# EAGLE board RJ45x5-panel (EAGLE 7.4.0)
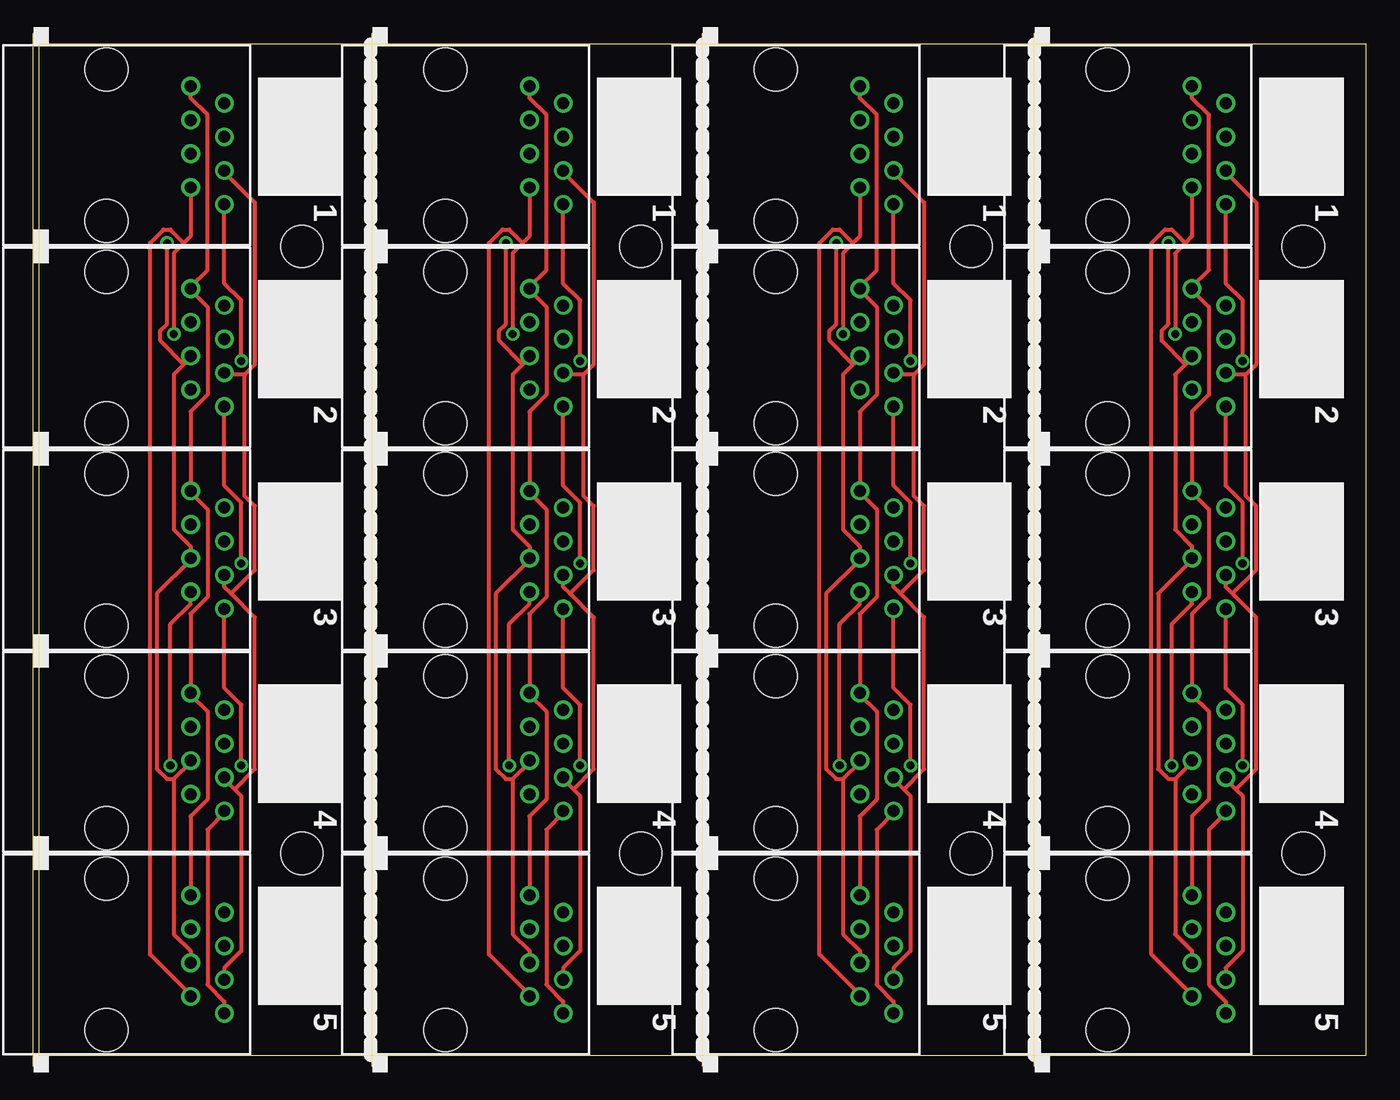
[diagram p0: board, top side]
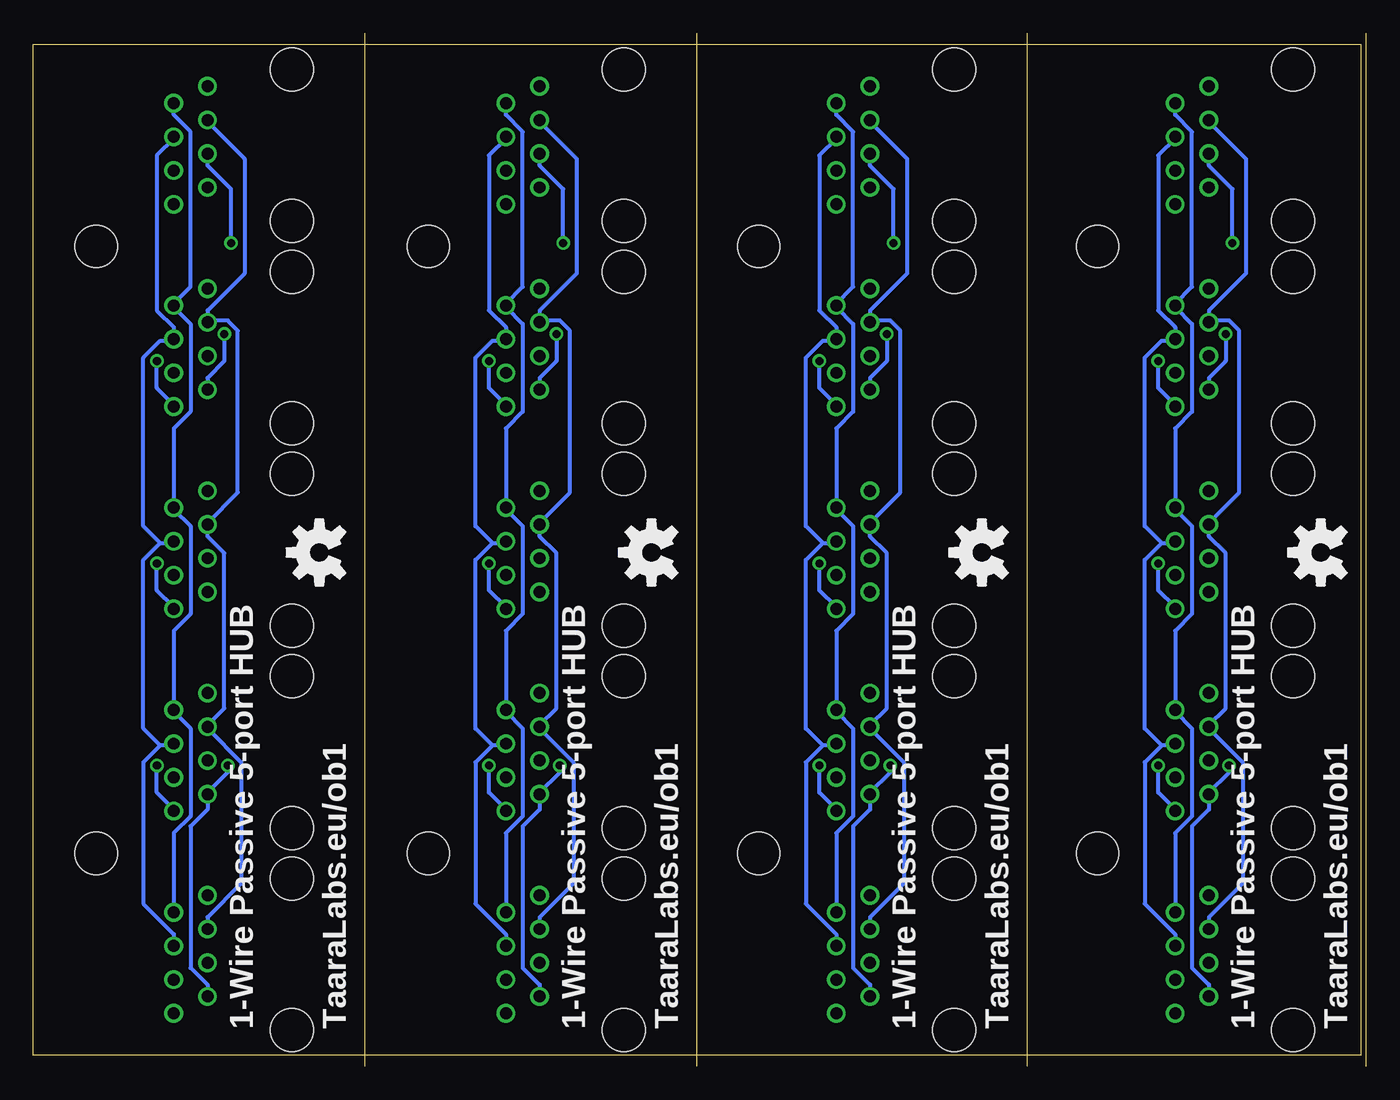
[diagram p1: board, bottom side, seen from below]

Size 100 x 76.19 mm. Coordinates in mm from the lower left corner, seen from the top.
Outline: 0,0 25,0 50,0 75,0 100,0 100,76.19 75,76.19 50,76.19 25,76.19 0,76.19 0,0
Copper layers (1*16): Top 0.035mm / dielectric 1.5mm / Bottom 0.035mm
Design rules "default *": minimum track width 12mil, minimum drill 24mil, track to track 8mil, track to pad 8mil, pad to pad 8mil, via to via 8mil, smd to smd 8mil, copper to edge 40mil, drill to drill 8mil, minimum pad ring 10mil, minimum via ring 8mil, stop-mask expansion 4mil, vias tented up to drill 0mil, thermal gap 10mil
Holes 3.2 mm at 19.81,60.96 19.81,15.24 45.34,60.96 45.34,15.24 70.23,60.96 70.23,15.24 95.25,60.96 95.25,15.24

## Footprints (pad centres in the part's own frame; a part is rotated, then mirrored left to right if it is on the bottom)
RJ45-NO-SHIELD = drill 0.9 pad 1.4: 1 -4.445,6.35; 2 -3.175,8.89; 3 -1.905,6.35; 4 -0.635,8.89; 5 0.635,6.35; 6 1.905,8.89; 7 3.175,6.35; 8 4.445,8.89 | hole 3.251: -5.715,0; 5.715,0

## Placement (x,y rotation side)
1  RJ45-6L-B  [RJ45-NO-SHIELD]  5.08,7.62 270 top
2  RJ45-6L-B  [RJ45-NO-SHIELD]  5.08,22.86 270 top
3  RJ45-6L-B  [RJ45-NO-SHIELD]  5.08,38.1 270 top
4  RJ45-6L-B  [RJ45-NO-SHIELD]  5.08,53.34 270 top
5  RJ45-6L-B  [RJ45-NO-SHIELD]  5.08,68.58 270 top
6  RJ45-6L-B  [RJ45-NO-SHIELD]  30.61,7.62 270 top
7  RJ45-6L-B  [RJ45-NO-SHIELD]  30.61,22.86 270 top
8  RJ45-6L-B  [RJ45-NO-SHIELD]  30.61,38.1 270 top
9  RJ45-6L-B  [RJ45-NO-SHIELD]  30.61,53.34 270 top
10  RJ45-6L-B  [RJ45-NO-SHIELD]  30.61,68.58 270 top
11  RJ45-6L-B  [RJ45-NO-SHIELD]  55.5,7.62 270 top
12  RJ45-6L-B  [RJ45-NO-SHIELD]  55.5,22.86 270 top
13  RJ45-6L-B  [RJ45-NO-SHIELD]  55.5,38.1 270 top
14  RJ45-6L-B  [RJ45-NO-SHIELD]  55.5,53.34 270 top
15  RJ45-6L-B  [RJ45-NO-SHIELD]  55.5,68.58 270 top
16  RJ45-6L-B  [RJ45-NO-SHIELD]  80.52,7.62 270 top
17  RJ45-6L-B  [RJ45-NO-SHIELD]  80.52,22.86 270 top
18  RJ45-6L-B  [RJ45-NO-SHIELD]  80.52,38.1 270 top
19  RJ45-6L-B  [RJ45-NO-SHIELD]  80.52,53.34 270 top
20  RJ45-6L-B  [RJ45-NO-SHIELD]  80.52,68.58 270 top
U$1  [OSHW-LOGO-M]  3,37.9 90 bottom
U$2  [OSHW-LOGO-M]  28.53,37.9 90 bottom
U$3  [OSHW-LOGO-M]  53.42,37.9 90 bottom
U$4  [OSHW-LOGO-M]  78.44,37.9 90 bottom

## Library data of the parts
1-20 = con-tycoelectronics; MPN: RJ45-6L-B; OC_FARNELL: unknown; OC_NEWARK: 16R6090
U$1-U$4 = SparkFun

## Nets
1: 1.1 2.1 3.1 4.1 5.1
2: 1.2 2.2 3.2 4.2 5.2
3: 1.3 2.3 3.3 4.3 5.3
4: 1.4 2.4 3.4 4.4 5.4
5: 1.5 2.5 3.5 4.5 5.5
6: 1.6 2.6 3.6 4.6 5.6
7: 1.7 2.7 3.7 4.7 5.7
8: 1.8 2.8 3.8 4.8 5.8
9: 6.1 7.1 8.1 9.1 10.1
10: 6.2 7.2 8.2 9.2 10.2
11: 6.3 7.3 8.3 9.3 10.3
12: 6.4 7.4 8.4 9.4 10.4
13: 6.5 7.5 8.5 9.5 10.5
14: 6.6 7.6 8.6 9.6 10.6
15: 6.7 7.7 8.7 9.7 10.7
16: 6.8 7.8 8.8 9.8 10.8
17: 11.1 12.1 13.1 14.1 15.1
18: 11.2 12.2 13.2 14.2 15.2
19: 11.3 12.3 13.3 14.3 15.3
20: 11.4 12.4 13.4 14.4 15.4
21: 11.5 12.5 13.5 14.5 15.5
22: 11.6 12.6 13.6 14.6 15.6
23: 11.7 12.7 13.7 14.7 15.7
24: 11.8 12.8 13.8 14.8 15.8
25: 16.1 17.1 18.1 19.1 20.1
26: 16.2 17.2 18.2 19.2 20.2
27: 16.3 17.3 18.3 19.3 20.3
28: 16.4 17.4 18.4 19.4 20.4
29: 16.5 17.5 18.5 19.5 20.5
30: 16.6 17.6 18.6 19.6 20.6
31: 16.7 17.7 18.7 19.7 20.7
32: 16.8 17.8 18.8 19.8 20.8

## Tracks (layer width: path | path; a pad name or v marks a point on that pad's centre or on a via)
1
  Top 0.305: 1.1 11.43,18.03 12.7,19.3 12.7,25.91 11.43,27.18 2.1 11.43,33.27 12.7,34.54 12.7,41.15 11.43,42.42 3.1 11.43,48.51 12.7,49.78 12.7,56.39 11.43,57.66 4.1 11.43,57.91 12.7,59.18 12.7,70.87 11.43,72.14 5.1
2
  Bottom 0.305: 1.2 13.97,16.76 12.7,18.03 12.7,24.64 13.97,25.91 2.2 13.97,32 12.7,33.27 12.7,39.88 13.97,41.15 3.2 13.97,47.24 12.7,48.51 12.7,55.12 13.97,56.39 4.2 13.97,56.64 12.7,57.91 12.7,69.6 13.97,70.87 5.2
3
  Bottom 0.305: 11.43,55.37 11.43,56.13 8.64,58.93 8.64,67.56 11.43,70.36 5.3 | 1.3 11.43,10.41 8.89,12.95 8.89,22.1 11.43,24.64 2.3 11.43,24.89 10.16,26.16 10.16,37.85 11.43,39.12 3.3 11.43,40.13 9.14,42.42 9.14,54.61 9.91,55.37 11.43,55.37 | 11.43,55.37 4.3
4
  Bottom 0.305: 5.4 13.97,69.09 15.24,67.82 15.24,56.13 13.97,54.86 4.4 13.97,53.85 14.99,53.85 16.26,52.58 16.26,39.88 14.99,38.61 | 1.4 13.97,9.14 16.26,11.43 16.26,22.1 14.99,23.37 | 14.99,23.37 13.97,23.37 2.4 | 14.99,38.61 13.97,38.61 3.4 | 14.99,38.61 16.26,37.34 16.26,24.64 14.99,23.37
5  (via drill 0.61)
  Top 0.305: 1.5 11.43,7.87 10.16,9.14 10.16,20.83 | 10.16,20.83 11.43,22.1 2.5 | 10.92,52.07 11.43,52.58 4.5 | 10.92,52.07 10.16,51.31 10.16,39.62 11.43,38.35 3.5 11.43,37.34 8.89,34.8 8.89,21.59 9.65,20.83 10.16,20.83 | v9.65,61.21 9.65,55.12 9.14,54.61 9.14,53.85 10.92,52.07
  Bottom 0.305: 5.5 11.43,67.06 9.65,65.28 v9.65,61.21
6
  Top 0.305: 15.49,51.31 13.97,51.31 4.6 | 15.49,51.31 16.26,52.07 16.26,64.26 13.97,66.55 5.6 | 1.6 13.97,6.6 15.24,7.87 15.24,19.56 14.73,20.07 | 14.73,20.07 13.97,20.83 2.6 | 3.6 13.97,35.31 14.48,34.8 | 14.48,34.8 16.26,33.02 16.26,21.59 14.73,20.07 | 15.49,51.31 15.49,42.16 16.26,41.4 16.26,36.58 14.48,34.8
7  (via drill 0.61)
  Top 0.305: v10.16,54.36 10.16,60.45 10.92,61.21 | 10.92,61.21 11.43,61.72 5.7 | 3.7 11.43,34.04 9.91,32.51 v9.91,21.84 | 10.92,61.21 9.91,62.23 9.4,62.23 8.38,61.21 8.38,7.62 11.43,4.57 1.7
  Bottom 0.305: 4.7 11.43,51.05 10.16,52.32 v10.16,54.36 | 1.7 11.43,5.33 12.7,6.6 12.7,17.27 11.43,18.54 2.7 11.43,19.81 9.91,21.34 v9.91,21.84
8  (via drill 0.61)
  Top 0.305: 1.8 13.97,4.06 12.7,5.33 12.7,17.02 13.97,18.29 2.8 | 3.8 13.97,27.69 15.24,26.42 v15.24,21.84 | 4.8 13.97,42.93 15.24,41.66 v15.24,37.08 | 5.8 13.97,58.17 15.24,56.9 v15.24,52.32
  Bottom 0.305: v15.24,21.84 15.24,19.81 13.97,18.54 2.8 | v15.24,37.08 15.24,35.05 13.97,33.78 3.8 | v15.24,52.32 15.24,50.29 13.97,49.02 4.8
9
  Top 0.305: 6.1 36.96,18.03 38.23,19.3 38.23,25.91 36.96,27.18 7.1 36.96,33.27 38.23,34.54 38.23,41.15 36.96,42.42 8.1 36.96,48.51 38.23,49.78 38.23,56.39 36.96,57.66 9.1 36.96,57.91 38.23,59.18 38.23,70.87 36.96,72.14 10.1
10
  Bottom 0.305: 6.2 39.5,16.76 38.23,18.03 38.23,24.64 39.5,25.91 7.2 39.5,32 38.23,33.27 38.23,39.88 39.5,41.15 8.2 39.5,47.24 38.23,48.51 38.23,55.12 39.5,56.39 9.2 39.5,56.64 38.23,57.91 38.23,69.6 39.5,70.87 10.2
11
  Bottom 0.305: 36.96,55.37 36.96,56.13 34.16,58.93 34.16,67.56 36.96,70.36 10.3 | 6.3 36.96,10.41 34.42,12.95 34.42,22.1 36.96,24.64 7.3 36.96,24.89 35.69,26.16 35.69,37.85 36.96,39.12 8.3 36.96,40.13 34.67,42.42 34.67,54.61 35.43,55.37 36.96,55.37 | 36.96,55.37 9.3
12
  Bottom 0.305: 10.4 39.5,69.09 40.77,67.82 40.77,56.13 39.5,54.86 9.4 39.5,53.85 40.51,53.85 41.78,52.58 41.78,39.88 40.51,38.61 | 6.4 39.5,9.14 41.78,11.43 41.78,22.1 40.51,23.37 | 40.51,23.37 39.5,23.37 7.4 | 40.51,38.61 39.5,38.61 8.4 | 40.51,38.61 41.78,37.34 41.78,24.64 40.51,23.37
13  (via drill 0.61)
  Top 0.305: 6.5 36.96,7.87 35.69,9.14 35.69,20.83 | 35.69,20.83 36.96,22.1 7.5 | 36.45,52.07 36.96,52.58 9.5 | 36.45,52.07 35.69,51.31 35.69,39.62 36.96,38.35 8.5 36.96,37.34 34.42,34.8 34.42,21.59 35.18,20.83 35.69,20.83 | v35.18,61.21 35.18,55.12 34.67,54.61 34.67,53.85 36.45,52.07
  Bottom 0.305: 10.5 36.96,67.06 35.18,65.28 v35.18,61.21
14
  Top 0.305: 41.02,51.31 39.5,51.31 9.6 | 41.02,51.31 41.78,52.07 41.78,64.26 39.5,66.55 10.6 | 6.6 39.5,6.6 40.77,7.87 40.77,19.56 40.26,20.07 | 40.26,20.07 39.5,20.83 7.6 | 8.6 39.5,35.31 40.01,34.8 | 40.01,34.8 41.78,33.02 41.78,21.59 40.26,20.07 | 41.02,51.31 41.02,42.16 41.78,41.4 41.78,36.58 40.01,34.8
15  (via drill 0.61)
  Top 0.305: v35.69,54.36 35.69,60.45 36.45,61.21 | 36.45,61.21 36.96,61.72 10.7 | 8.7 36.96,34.04 35.43,32.51 v35.43,21.84 | 36.45,61.21 35.43,62.23 34.92,62.23 33.91,61.21 33.91,7.62 36.96,4.57 6.7
  Bottom 0.305: 9.7 36.96,51.05 35.69,52.32 v35.69,54.36 | 6.7 36.96,5.33 38.23,6.6 38.23,17.27 36.96,18.54 7.7 36.96,19.81 35.43,21.34 v35.43,21.84
16  (via drill 0.61)
  Top 0.305: 6.8 39.5,4.06 38.23,5.33 38.23,17.02 39.5,18.29 7.8 | 8.8 39.5,27.69 40.77,26.42 v40.77,21.84 | 9.8 39.5,42.93 40.77,41.66 v40.77,37.08 | 10.8 39.5,58.17 40.77,56.9 v40.77,52.32
  Bottom 0.305: v40.77,21.84 40.77,19.81 39.5,18.54 7.8 | v40.77,37.08 40.77,35.05 39.5,33.78 8.8 | v40.77,52.32 40.77,50.29 39.5,49.02 9.8
17
  Top 0.305: 11.1 61.85,18.03 63.12,19.3 63.12,25.91 61.85,27.18 12.1 61.85,33.27 63.12,34.54 63.12,41.15 61.85,42.42 13.1 61.85,48.51 63.12,49.78 63.12,56.39 61.85,57.66 14.1 61.85,57.91 63.12,59.18 63.12,70.87 61.85,72.14 15.1
18
  Bottom 0.305: 11.2 64.39,16.76 63.12,18.03 63.12,24.64 64.39,25.91 12.2 64.39,32 63.12,33.27 63.12,39.88 64.39,41.15 13.2 64.39,47.24 63.12,48.51 63.12,55.12 64.39,56.39 14.2 64.39,56.64 63.12,57.91 63.12,69.6 64.39,70.87 15.2
19
  Bottom 0.305: 61.85,55.37 61.85,56.13 59.05,58.93 59.05,67.56 61.85,70.36 15.3 | 11.3 61.85,10.41 59.31,12.95 59.31,22.1 61.85,24.64 12.3 61.85,24.89 60.58,26.16 60.58,37.85 61.85,39.12 13.3 61.85,40.13 59.56,42.42 59.56,54.61 60.33,55.37 61.85,55.37 | 61.85,55.37 14.3
20
  Bottom 0.305: 15.4 64.39,69.09 65.66,67.82 65.66,56.13 64.39,54.86 14.4 64.39,53.85 65.41,53.85 66.67,52.58 66.67,39.88 65.41,38.61 | 11.4 64.39,9.14 66.67,11.43 66.67,22.1 65.41,23.37 | 65.41,23.37 64.39,23.37 12.4 | 65.41,38.61 64.39,38.61 13.4 | 65.41,38.61 66.67,37.34 66.67,24.64 65.41,23.37
21  (via drill 0.61)
  Top 0.305: 11.5 61.85,7.87 60.58,9.14 60.58,20.83 | 60.58,20.83 61.85,22.1 12.5 | 61.34,52.07 61.85,52.58 14.5 | 61.34,52.07 60.58,51.31 60.58,39.62 61.85,38.35 13.5 61.85,37.34 59.31,34.8 59.31,21.59 60.07,20.83 60.58,20.83 | v60.07,61.21 60.07,55.12 59.56,54.61 59.56,53.85 61.34,52.07
  Bottom 0.305: 15.5 61.85,67.06 60.07,65.28 v60.07,61.21
22
  Top 0.305: 65.91,51.31 64.39,51.31 14.6 | 65.91,51.31 66.67,52.07 66.67,64.26 64.39,66.55 15.6 | 11.6 64.39,6.6 65.66,7.87 65.66,19.56 65.15,20.07 | 65.15,20.07 64.39,20.83 12.6 | 13.6 64.39,35.31 64.9,34.8 | 64.9,34.8 66.67,33.02 66.67,21.59 65.15,20.07 | 65.91,51.31 65.91,42.16 66.67,41.4 66.67,36.58 64.9,34.8
23  (via drill 0.61)
  Top 0.305: v60.58,54.36 60.58,60.45 61.34,61.21 | 61.34,61.21 61.85,61.72 15.7 | 13.7 61.85,34.04 60.33,32.51 v60.33,21.84 | 61.34,61.21 60.33,62.23 59.82,62.23 58.8,61.21 58.8,7.62 61.85,4.57 11.7
  Bottom 0.305: 14.7 61.85,51.05 60.58,52.32 v60.58,54.36 | 11.7 61.85,5.33 63.12,6.6 63.12,17.27 61.85,18.54 12.7 61.85,19.81 60.33,21.34 v60.33,21.84
24  (via drill 0.61)
  Top 0.305: 11.8 64.39,4.06 63.12,5.33 63.12,17.02 64.39,18.29 12.8 | 13.8 64.39,27.69 65.66,26.42 v65.66,21.84 | 14.8 64.39,42.93 65.66,41.66 v65.66,37.08 | 15.8 64.39,58.17 65.66,56.9 v65.66,52.32
  Bottom 0.305: v65.66,21.84 65.66,19.81 64.39,18.54 12.8 | v65.66,37.08 65.66,35.05 64.39,33.78 13.8 | v65.66,52.32 65.66,50.29 64.39,49.02 14.8
25
  Top 0.305: 16.1 86.87,18.03 88.14,19.3 88.14,25.91 86.87,27.18 17.1 86.87,33.27 88.14,34.54 88.14,41.15 86.87,42.42 18.1 86.87,48.51 88.14,49.78 88.14,56.39 86.87,57.66 19.1 86.87,57.91 88.14,59.18 88.14,70.87 86.87,72.14 20.1
26
  Bottom 0.305: 16.2 89.41,16.76 88.14,18.03 88.14,24.64 89.41,25.91 17.2 89.41,32 88.14,33.27 88.14,39.88 89.41,41.15 18.2 89.41,47.24 88.14,48.51 88.14,55.12 89.41,56.39 19.2 89.41,56.64 88.14,57.91 88.14,69.6 89.41,70.87 20.2
27
  Bottom 0.305: 86.87,55.37 86.87,56.13 84.07,58.93 84.07,67.56 86.87,70.36 20.3 | 16.3 86.87,10.41 84.33,12.95 84.33,22.1 86.87,24.64 17.3 86.87,24.89 85.6,26.16 85.6,37.85 86.87,39.12 18.3 86.87,40.13 84.58,42.42 84.58,54.61 85.34,55.37 86.87,55.37 | 86.87,55.37 19.3
28
  Bottom 0.305: 20.4 89.41,69.09 90.68,67.82 90.68,56.13 89.41,54.86 19.4 89.41,53.85 90.42,53.85 91.69,52.58 91.69,39.88 90.42,38.61 | 16.4 89.41,9.14 91.69,11.43 91.69,22.1 90.42,23.37 | 90.42,23.37 89.41,23.37 17.4 | 90.42,38.61 89.41,38.61 18.4 | 90.42,38.61 91.69,37.34 91.69,24.64 90.42,23.37
29  (via drill 0.61)
  Top 0.305: 16.5 86.87,7.87 85.6,9.14 85.6,20.83 | 85.6,20.83 86.87,22.1 17.5 | 86.36,52.07 86.87,52.58 19.5 | 86.36,52.07 85.6,51.31 85.6,39.62 86.87,38.35 18.5 86.87,37.34 84.33,34.8 84.33,21.59 85.09,20.83 85.6,20.83 | v85.09,61.21 85.09,55.12 84.58,54.61 84.58,53.85 86.36,52.07
  Bottom 0.305: 20.5 86.87,67.06 85.09,65.28 v85.09,61.21
30
  Top 0.305: 90.93,51.31 89.41,51.31 19.6 | 90.93,51.31 91.69,52.07 91.69,64.26 89.41,66.55 20.6 | 16.6 89.41,6.6 90.68,7.87 90.68,19.56 90.17,20.07 | 90.17,20.07 89.41,20.83 17.6 | 18.6 89.41,35.31 89.92,34.8 | 89.92,34.8 91.69,33.02 91.69,21.59 90.17,20.07 | 90.93,51.31 90.93,42.16 91.69,41.4 91.69,36.58 89.92,34.8
31  (via drill 0.61)
  Top 0.305: v85.6,54.36 85.6,60.45 86.36,61.21 | 86.36,61.21 86.87,61.72 20.7 | 18.7 86.87,34.04 85.34,32.51 v85.34,21.84 | 86.36,61.21 85.34,62.23 84.84,62.23 83.82,61.21 83.82,7.62 86.87,4.57 16.7
  Bottom 0.305: 19.7 86.87,51.05 85.6,52.32 v85.6,54.36 | 16.7 86.87,5.33 88.14,6.6 88.14,17.27 86.87,18.54 17.7 86.87,19.81 85.34,21.34 v85.34,21.84
32  (via drill 0.61)
  Top 0.305: 16.8 89.41,4.06 88.14,5.33 88.14,17.02 89.41,18.29 17.8 | 18.8 89.41,27.69 90.68,26.42 v90.68,21.84 | 19.8 89.41,42.93 90.68,41.66 v90.68,37.08 | 20.8 89.41,58.17 90.68,56.9 v90.68,52.32
  Bottom 0.305: v90.68,21.84 90.68,19.81 89.41,18.54 17.8 | v90.68,37.08 90.68,35.05 89.41,33.78 18.8 | v90.68,52.32 90.68,50.29 89.41,49.02 19.8

## Text on the board
tNames: 1 | 1 | 1 | 1 | 2 | 2 | 2 | 2 | 3 | 3 | 3 | 3 | 4 | 4 | 4 | 4 | 5 | 5 | 5 | 5
bNames: TaaraLabs.eu/ob1 | 1-Wire Passive 5-port HUB | TaaraLabs.eu/ob1 | 1-Wire Passive 5-port HUB | TaaraLabs.eu/ob1 | 1-Wire Passive 5-port HUB | TaaraLabs.eu/ob1 | 1-Wire Passive 5-port HUB